# EAGLE board _elevator system (EAGLE 9.7.0)

Size 170.96 x 161.46 mm. Coordinates in mm from the lower left corner, seen from the top.
Outline: 0,0 170.96,0 170.96,161.46 0,161.46 0,0
Copper layers (1*16): Top 0.035mm / dielectric 1.5mm / Bottom 0.035mm
Design rules "default": minimum track width 6mil, minimum drill 0.35mm, track to track 6mil, track to pad 6mil, pad to pad 6mil, via to via 6mil, smd to smd 6mil, copper to edge 40mil, drill to drill 6mil, minimum pad ring 10mil, minimum via ring 8mil, stop-mask expansion 4mil, vias tented up to drill 0mil, thermal gap 10mil

## Footprints (pad centres in the part's own frame; a part is rotated, then mirrored left to right if it is on the bottom)
BATTERY-GENERIC = drill 1.118 pad 3.15 octagon: + 2.54,0; - -2.54,0
LEDRD254W60D565H860B = drill 0.981 pad 1.581: 1 -1.27,0; 2 1.27,0
MOTOR = drill 1.118 pad 3.15 octagon: + 2.54,0; - -2.54,0
RESAD1016W63L850D250B = drill 0.83 pad 1.43: 1 -5.08,0; 2 5.08,0
SWITCH-MOMENTARY-PTH-6.5MM = drill 1.016 pad 1.88: 1 -3.251,2.261; 2 3.251,2.261; 3 -3.251,-2.261; 4 3.251,-2.261
ARDUINO-UNO-R3-SHIELD = drill 1.016 pad 1.88: 3.3V 24.13,-2.54; 5V 24.13,0; A0 24.13,12.7; A1 24.13,15.24; A2 24.13,17.78; A3 24.13,20.32; A4 24.13,22.86; A5 24.13,25.4; AREF -24.13,-13.97; D2 -24.13,20.32; D3 -24.13,17.78; D4 -24.13,15.24; D5 -24.13,12.7; D6 -24.13,10.16; D7 -24.13,7.62; D8 -24.13,3.81; D9 -24.13,1.27; D10 -24.13,-1.27; D11 -24.13,-3.81; D12 -24.13,-6.35; D13 -24.13,-8.89; GND@0 24.13,2.54; GND@1 24.13,5.08; GND@2 -24.13,-11.43; IOREF 24.13,-7.62; NC 24.13,-10.16; RES 24.13,-5.08; RX -24.13,25.4; SCL -24.13,-19.05; SDA -24.13,-16.51; TX -24.13,22.86; VIN 24.13,7.62
DIP762W53P254L1969H508Q16B = drill 0.743 pad 1.343: 1 -3.81,8.89; 2 -3.81,6.35; 3 -3.81,3.81; 4 -3.81,1.27; 5 -3.81,-1.27; 6 -3.81,-3.81; 7 -3.81,-6.35; 8 -3.81,-8.89; 9 3.81,-8.89; 10 3.81,-6.35; 11 3.81,-3.81; 12 3.81,-1.27; 13 3.81,1.27; 14 3.81,3.81; 15 3.81,6.35; 16 3.81,8.89

## Placement (x,y rotation side)
BAT1  9V  [BATTERY-GENERIC]  116.14,8.26 180 top
D1  RED  [LEDRD254W60D565H860B]  40.88,124.8 180 top
D2  RED  [LEDRD254W60D565H860B]  23.18,139.15 180 top
D3  RED  [LEDRD254W60D565H860B]  7.66,153.55 180 top
M1  MOTOR_HDR  [MOTOR]  154.08,79.55 0 top
R1  220  [RESAD1016W63L850D250B]  6.33,132.93 90 top
R2  220  [RESAD1016W63L850D250B]  39.5,115.39 90 top
R3  220  [RESAD1016W63L850D250B]  21.77,121.87 90 top
S1  SWITCH_MOMENTARY  [SWITCH-MOMENTARY-PTH-6.5MM]  70.61,108.49 0 top
S2  SWITCH_MOMENTARY  [SWITCH-MOMENTARY-PTH-6.5MM]  71.17,122.18 0 top
S3  SWITCH_MOMENTARY  [SWITCH-MOMENTARY-PTH-6.5MM]  71.17,137.54 0 top
U1  ARDUINO-UNO-R3-SHIELD  [ARDUINO-UNO-R3-SHIELD]  65.48,54.28 270 top
U2  L293E  [DIP762W53P254L1969H508Q16B]  155.57,60.43 270 top

## Library data of the parts
BAT1 M1 R1-R3 S1-S3 U1 U2 = Tinkercad
D1-D3 = Tinkercad; CATEGORY: Opto-Electronic; SUB-CATEGORY: LED; VALUE: LED_RED

## Nets
BAT1+: BAT1.+ U2.8
BAT1-: BAT1.- R1.1 R2.1 R3.1 S1.1 S2.1 S3.1 U1.GND@0 U1.GND@1 U1.GND@2 U2.4 U2.5 U2.12 U2.13
D1_C: D1.2 R2.2
D2_C: D2.2 R3.2
D3_C: D3.2 R1.2
M1_+: M1.+ U2.3
M1_-: M1.- U2.6
U1_5V: U1.5V U2.16
U1_D2: S1.4 U1.D2
U1_D3: S2.4 U1.D3
U1_D4: S3.4 U1.D4
U1_D5: D1.1 U1.D5
U1_D6: D2.1 U1.D6
U1_D7: D3.1 U1.D7
U1_D8: U1.D8 U2.2
U1_D9: U1.D9 U2.7
U1_D10: U1.D10 U2.1

## Tracks (layer width: path | path; a pad name or v marks a point on that pad's centre or on a via)
BAT1+  (1 unrouted)
BAT1-  (13 unrouted)
D1_C  (1 unrouted)
D2_C  (1 unrouted)
D3_C  (1 unrouted)
M1_+  (1 unrouted)
M1_-  (1 unrouted)
U1_5V  (1 unrouted)
U1_D2  (1 unrouted)
U1_D3  (1 unrouted)
U1_D4  (1 unrouted)
U1_D5  (1 unrouted)
U1_D6  (1 unrouted)
U1_D7  (1 unrouted)
U1_D8  (1 unrouted)
U1_D9  (1 unrouted)
U1_D10  (1 unrouted)